# EAGLE board schemantic (EAGLE 9.4.2)
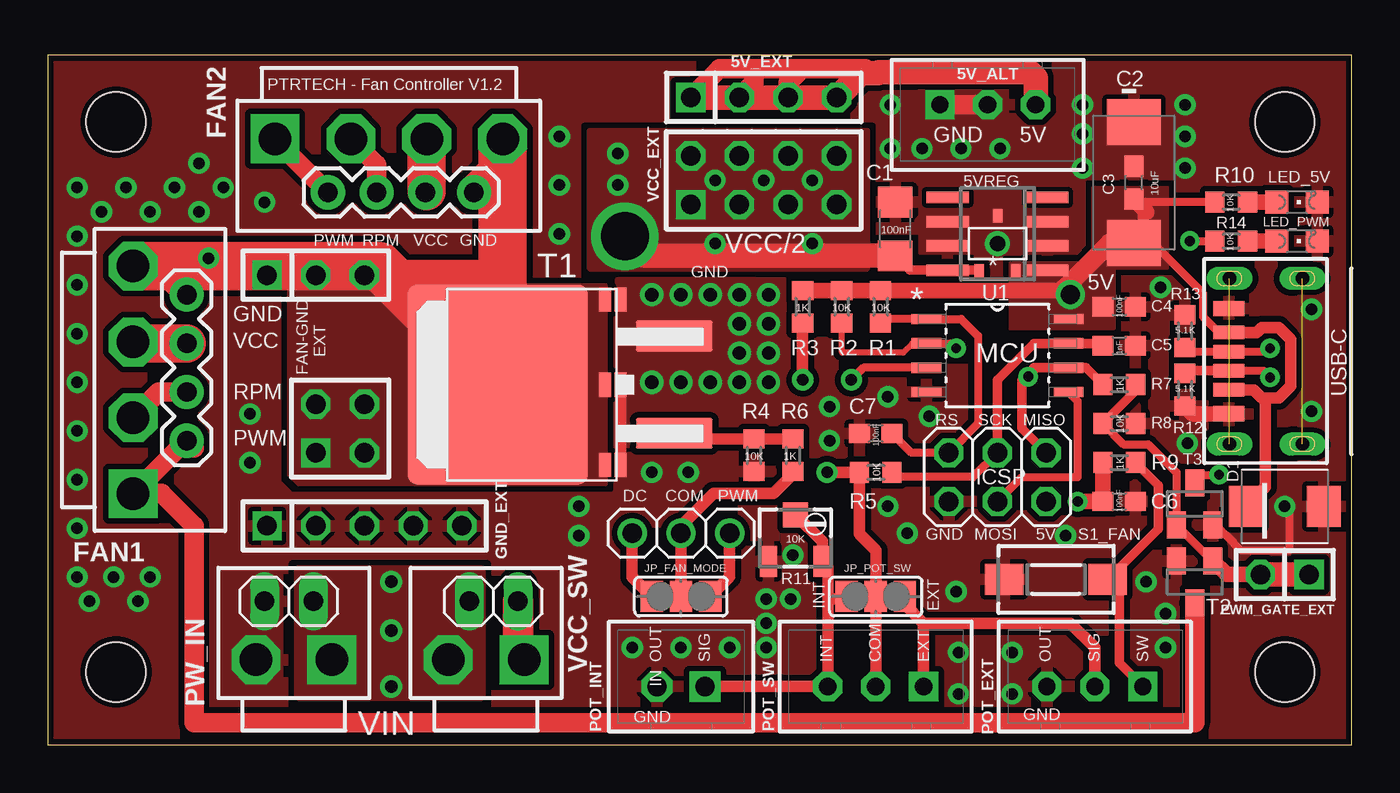
[diagram p0: board, top side]
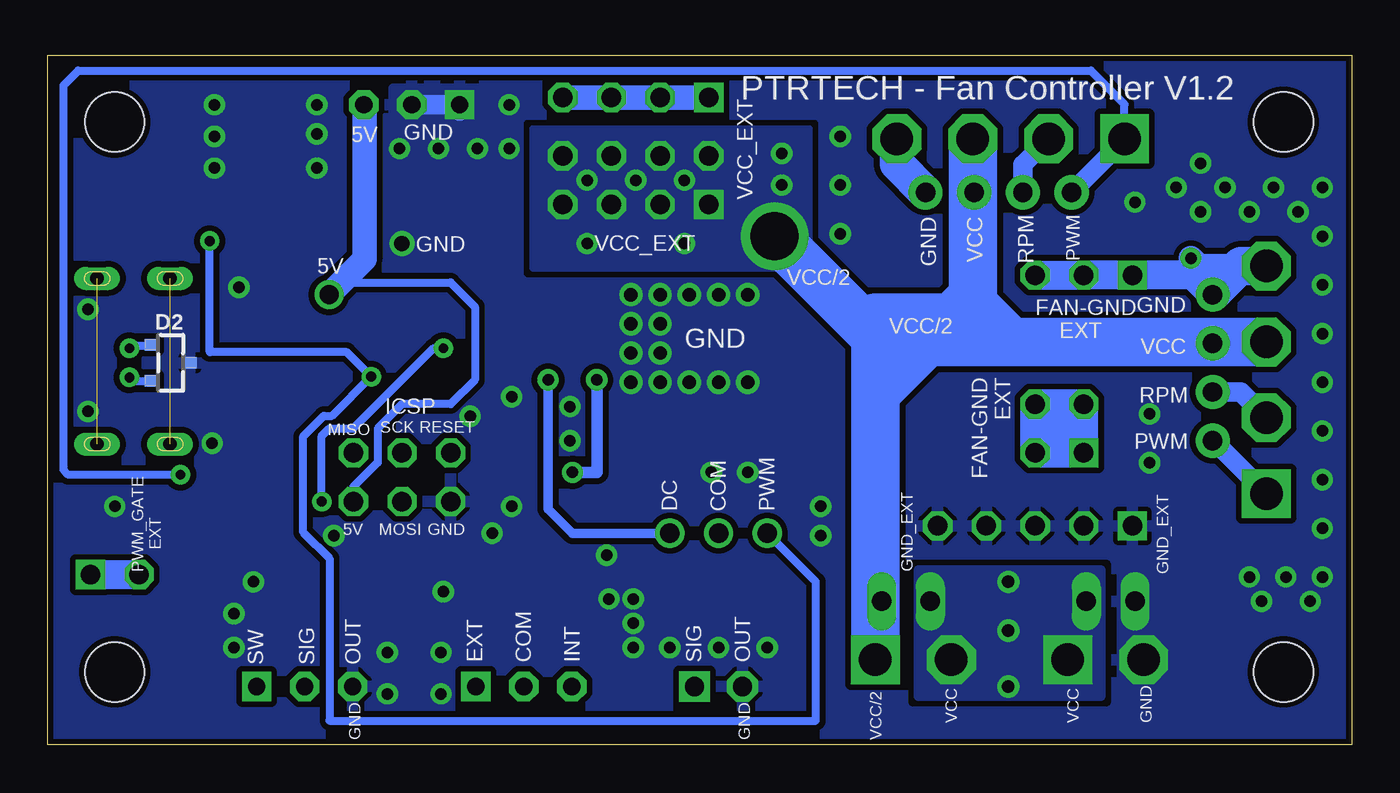
[diagram p1: board, bottom side, seen from below]

Size 68 x 36 mm. Coordinates in mm from the lower left corner, seen from the top.
Outline: 0,0 68,0 68,36 0,36 0,0
Copper layers (1*16): Top 0.035mm / dielectric 1.5mm / Bottom 0.035mm
Design rules "SparkFun-2-layer-STANDARD": minimum track width 10mil, minimum drill 20mil, track to track 10mil, track to pad 8mil, pad to pad 8mil, via to via 10mil, smd to smd 8mil, copper to edge 8mil, drill to drill 8mil, minimum pad ring 10mil, minimum via ring 10mil, stop-mask expansion 4mil, vias tented up to drill 25mil, thermal gap 10mil
Holes 3.1 mm at 3.56,3.81 3.56,32.5 64.52,3.81 64.52,32.5

## Footprints (pad centres in the part's own frame; a part is rotated, then mirrored left to right if it is on the bottom)
B3B-XH-A = drill 0.9 pad 1.524 square: 1 2.5,0 | drill 0.9 pad 1.524 octagon: 2 0,0; 3 -2.5,0
1X04 = drill 1.016 square: 1 -3.81,0 | drill 1.016 octagon: 2 -1.27,0; 3 1.27,0; 4 3.81,0
SO08 = smd 0.6 x 2.2: 1 -1.905,-2.6; 2 -0.635,-2.6; 3 0.635,-2.6; 4 1.905,-2.6; 5 1.905,2.6; 6 0.635,2.6; 7 -0.635,2.6; 8 -1.905,2.6
XC6206_SOT-23 = smd 0.5 x 0.7: 1 -0.95,-1.415; 2 0.95,-1.415; 3 0,1.44
C1206 = smd 1.6 x 1.8: 1 -1.4,0; 2 1.4,0
SMC_E = smd 2.4 x 2.8: + -3.15,0; - 3.15,0
C0603 = smd 1.1 x 1: 1 -0.85,0; 2 0.85,0
SMBJ = smd 1.78 x 2.16: A 2.04,0; C -2.03,0
SOT23 = smd 0.6 x 0.7: 1 -0.95,-1; 2 0.95,-1; 3 0,1
B4P-VH = drill 1.7 pad 2.54 square: 1 -5.94,0 | drill 1.7 pad 2.54 octagon: 2 -1.98,0; 3 1.98,0; 4 5.94,0
1X04-BIG = drill 1.016 pad 1.778: 1 0,0; 2 2.54,0; 3 5.08,0; 4 7.62,0
2X02 = drill 1.016 square: 1 -1.27,-1.27 | drill 1.016 octagon: 2 -1.27,1.27; 3 1.27,-1.27; 4 1.27,1.27
1X03 = drill 1.016 square: 1 -2.54,0 | drill 1.016 octagon: 2 0,0; 3 2.54,0
1X05 = drill 1.016 square: 1 -5.08,0 | drill 1.016 octagon: 2 -2.54,0; 3 0,0; 4 2.54,0; 5 5.08,0
2X03 = drill 1.016 octagon: 1 -2.54,-1.27; 2 -2.54,1.27; 3 0,-1.27; 4 0,1.27; 5 2.54,-1.27; 6 2.54,1.27
SMT-JUMPER_2_NO_NO-SILK = smd 0.635 x 1.27: 1 -0.406,0; 2 0.406,0
SJ_2 = smd 1.168 x 1.6: 1 -1.524,0; 2 0,0; 3 1.524,0
1X03' = drill 1.016: 1 -2.54,0; 2 0,0; 3 2.54,0
CHIPLED_0805 = smd 1.2 x 1.2: A 0,-1.05; C 0,1.05
B2B-XH-A = drill 1 pad 1.6 square: 1 1.25,0 | drill 1 pad 1.6 octagon: 2 -1.25,0
B2P-VH = drill 1.7 pad 2.54 square: 1 -1.98,0 | drill 1.7 pad 2.54 octagon: 2 1.98,0
1X02 = drill 1.016 long: 1 -1.27,0; 2 1.27,0
1X02' = drill 1.016 square: 1 -1.27,0 | drill 1.016 octagon: 2 1.27,0
R0603 = smd 1 x 1.1: 1 -0.85,0; 2 0.85,0
3223W = smd 0.9 x 1.6: 1 -1.4,-1.215; 3 1.4,-1.215 | smd 1.3 x 1.3: 2 0,1.215
DTSM-3 = smd 2 x 1.6: 1 -2.7,0; 2 2.7,0
D2PAK_TO263 = smd 4 x 1.6: 1 -6,2.54; 3 -6,-2.54 | smd 9.4 x 10.4: 2 3.2,0
SOT23' = smd 1 x 1.4: 1 -0.95,-1.1; 2 0.95,-1.1; 3 0,1.1
SOIC127P798X216-8N = smd 1.549 x 0.533: 1 -3.708,1.905; 2 -3.708,0.635; 3 -3.708,-0.635; 4 -3.708,-1.905; 5 3.708,-1.905; 6 3.708,-0.635; 7 3.708,0.635; 8 3.708,1.905
USB_TYPE_C_POWER_ONLY = smd 0.7 x 1.6: A5 -0.286,2.54; A9 1.71,2.54; B5 0.71,2.54; B9 -1.29,2.54 | smd 0.8 x 1.6: A12 2.96,2.54; B12 -2.54,2.54 | drill 0.7 pad 1 long: SHIELD1 -4.11,2.5; SHIELD2 4.53,2.5; SHIELD3 -4.11,-1.3; SHIELD4 4.53,-1.3
2X04 = drill 1.016 square: 1 -3.81,-1.27 | drill 1.016 octagon: 2 -3.81,1.27; 3 -1.27,-1.27; 4 -1.27,1.27; 5 1.27,-1.27; 6 1.27,1.27; 7 3.81,-1.27; 8 3.81,1.27

## Placement (x,y rotation side)
5V_ALT  B3B-XH-2  [B3B-XH-A]  49.02,33.4 180 top
5V_EXT  [1X04]  37.34,33.78 0 top
5VREG  LM2936M-5.0  [SO08]  49.53,26.67 90 top
5VREG_ALT  AP7381-50SA-7  [XC6206_SOT-23]  49.53,26.16 0 top
C1  100nF 60v  [C1206]  44.2,26.92 90 top
C2  10uF 10v  [SMC_E]  56.64,29.34 90 top
C3  2.2uF  [C0603]  56.64,29.34 90 top
C4  100nF  [C0603]  55.88,22.86 0 top
C5  1nF  [C0603]  55.88,20.83 0 top
C6  100nF  [C0603]  55.88,12.7 0 top
C7  100nF  [C0603]  43.18,16.26 180 top
D1  SMBJ5.0A  [SMBJ]  64.52,12.45 0 top
D2  CDSOT23-0502B  [SOT23]  61.59,19.94 270 bottom
FAN1  FAN1  [B4P-VH]  4.45,19.05 90 top
FAN1_ALT  1X4-BIG  [1X04-BIG]  7.24,15.88 90 top
FAN2  FAN1  [B4P-VH]  17.78,31.62 0 top
FAN2_ALT  1X4-BIG  [1X04-BIG]  14.61,28.83 0 top
FAN_GND_EXT1  [2X02]  15.24,16.51 0 top
FAN_GND_EXT2  [1X03]  13.97,24.51 0 top
GND_EXT  [1X05]  16.51,11.43 0 top
ICSP  Prog  [2X03]  49.53,13.97 180 top
JP1_T1_GND  JUMPER-SMT_2_NO_NO-SILK  [SMT-JUMPER_2_NO_NO-SILK]  29.46,18.8 180 top
JP2_T1_GND  JUMPER-SMT_2_NO_NO-SILK  [SMT-JUMPER_2_NO_NO-SILK]  29.46,14.61 180 top
JP31_T1_GND  JUMPER-SMT_2_NO_NO-SILK  [SMT-JUMPER_2_NO_NO-SILK]  29.46,23.24 180 top
JP_FAN_MODE  DC_COM_PWM  [SJ_2]  33.02,7.75 0 top
JP_FAN_MODE2  [1X03']  33.02,11.05 0 top
JP_POT_SW  [SJ_2]  43.18,7.75 0 top
LED_5V  [CHIPLED_0805]  65.15,28.32 270 top
LED_PWM  [CHIPLED_0805]  65.15,26.29 270 top
POT_EXT  POT_EXT  [B3B-XH-A]  54.61,3.05 0 top
POT_INT  POT_INT  [B2B-XH-A]  33.02,3.05 0 top
POT_SW  POT_SW  [B3B-XH-A]  43.18,3.05 0 top
PW_IN  Power In  [B2P-VH]  12.83,4.45 180 top
PW_IN_ALT  [1X02]  12.57,7.49 180 top
PWM_GATE_EXT  [1X02']  64.52,8.89 180 top
R1  10K  [R0603]  43.43,22.86 270 top
R2  10K  [R0603]  41.4,22.86 270 top
R3  1K  [R0603]  39.37,22.86 90 top
R4  10K  [R0603]  36.83,15.11 90 top
R5  10K  [R0603]  43.18,14.22 0 top
R6  1K  [R0603]  38.86,15.11 270 top
R7  1K  [R0603]  55.88,18.8 180 top
R8  10K  [R0603]  55.88,16.76 180 top
R9  1K  [R0603]  55.88,14.73 0 top
R10  10K  [R0603]  61.72,28.32 0 top
R11  10K  [3223W]  38.99,10.79 0 top
R12  5.1K  [R0603]  59.31,18.54 270 top
R13  5.1K  [R0603]  59.31,21.59 270 top
R14  10K  [R0603]  61.72,26.29 180 top
S1_FAN  DTSM-3  [DTSM-3]  52.58,8.64 0 top
T1  BUK963R3-60E,118  [D2PAK_TO263]  26.67,18.8 180 top
T2  AO3400  [SOT23']  59.82,8.51 180 top
T3  AO3400  [SOT23']  59.82,12.57 0 top
U1  ATTINY85-20SU  [SOIC127P798X216-8N]  49.53,20.32 0 top
USB-C  USB_TYPE_C_POWER_ONLY  [USB_TYPE_C_POWER_ONLY]  64.14,19.81 90 top
VCC_EXT  [2X04]  37.34,29.46 0 top
VCC_SW  Power SW  [B2P-VH]  22.86,4.45 180 top
VCC_SW_ALT  [1X02]  23.24,7.49 180 top

## Library data of the parts
5V_ALT POT_EXT POT_INT POT_SW = con-jst-xh
5V_EXT FAN_GND_EXT1 FAN_GND_EXT2 GND_EXT ICSP PW_IN_ALT PWM_GATE_EXT VCC_EXT VCC_SW_ALT = pinhead
5VREG = national-semiconductor; MF: NATIONAL SEMICONDUCTOR; MPN: LM2936HVMA-5.0/NOPB; OC_FARNELL: 9494421; OC_NEWARK: 41K4515
5VREG_ALT = Voltage Regulator; C1: 1uF
C1 C3-C7 = rcl; SPICEPREFIX: C
C2 = rcl; MODEL: 593D106X9050E2TE3; SPICEPREFIX: C
D1 D2 = diode
FAN1 FAN2 PW_IN VCC_SW = con-jst-vh
FAN1_ALT FAN2_ALT = adafruit
JP1_T1_GND JP2_T1_GND JP31_T1_GND = SparkFun-Jumpers
JP_FAN_MODE JP_POT_SW = jumper
JP_FAN_MODE2 = adafruit; 2PIN_FAN: 1&2; 3PIN_FAN: 1&2; 4PIN_FAN: 2&3
LED_5V LED_PWM = led
R1-R10 R12-R14 = rcl; SPICEPREFIX: R
R11 = pot; OPTIONAL: YES
S1_FAN = switch-tact; OPTIONAL: YES
T1 = we-transistor; ALT1: IRF2805SPbF; OLD: SQM110P06-8m9L_GE3
T2 T3 = adafruit; SPICEPREFIX: J
U1 = Atmel_By_element14_Batch_1-00; MPN: ATTINY85-20SU; OC_FARNELL: 1455164; OC_NEWARK: 58M3797; PACKAGE: SOIC-8; SUPPLIER: Atmel
USB-C = USB_C_FEMALE_POWER; CURRENT: HIGH; SOCKET: FEMALE

## Nets
+5V: 5V_ALT.3 5V_EXT.1 5V_EXT.2 5V_EXT.3 5V_EXT.4 5VREG.1 5VREG_ALT.2 C2.+ C3.1 C4.1 D1.C ICSP.2 R1.1 R2.1 R3.2 R10.1 U1.8 USB-C.A9 USB-C.B9
FAN1_LATCH: FAN1.2 FAN1_ALT.2
FAN1_PWM: FAN1.1 FAN1_ALT.1 T2.3
FAN2_LATCH: FAN2.2 FAN2_ALT.2
FAN2_PWM: FAN2.1 FAN2_ALT.1 T3.3
FAN_GND: FAN1.4 FAN1_ALT.4 FAN2.4 FAN2_ALT.4 FAN_GND_EXT1.1 FAN_GND_EXT1.2 FAN_GND_EXT1.3 FAN_GND_EXT1.4 FAN_GND_EXT2.1 FAN_GND_EXT2.2 FAN_GND_EXT2.3 JP1_T1_GND.2 JP2_T1_GND.2 JP31_T1_GND.2 T1.2
FAN_SW: POT_EXT.1 R9.2 S1_FAN.2
GND: 5V_ALT.1 5V_ALT.2 5VREG.2 5VREG.3 5VREG.6 5VREG.7 5VREG_ALT.3 C1.2 C2.- C3.2 C4.2 C5.2 C6.2 C7.2 D1.A D2.3 GND_EXT.1 GND_EXT.2 GND_EXT.3 GND_EXT.4 GND_EXT.5 ICSP.6 JP1_T1_GND.1 JP2_T1_GND.1 JP31_T1_GND.1 LED_5V.C LED_PWM.C POT_EXT.3 POT_INT.2 PW_IN.2 PW_IN_ALT.2 R4.1 R8.1 R11.1 R12.2 R13.1 S1_FAN.1 T1.3 T2.2 T3.2 U1.4 USB-C.A12 USB-C.B12
JP1_COM: JP_FAN_MODE2.2 JP_FAN_MODE.2 R6.2
LED1_ANODE: LED_5V.A R10.2
LED2_ANODE: LED_PWM.A R14.1
N$1: USB-C.SHIELD1 USB-C.SHIELD2
N$2: USB-C.SHIELD3 USB-C.SHIELD4
PB0_MOSI: ICSP.4 U1.5
PB1_MISO: ICSP.1 JP_FAN_MODE2.1 JP_FAN_MODE.1 R7.2 R14.2 U1.6
PB2_SCK: C5.1 ICSP.3 R5.2 U1.7
PB3: C6.1 R2.2 R9.1 U1.2
PB4: JP_FAN_MODE2.3 JP_FAN_MODE.3 U1.3
PB5_RESET: C7.1 ICSP.5 R1.2 U1.1
POTEXT_SIGNAL: JP_POT_SW.3 POT_EXT.2 POT_SW.1
POTINT_SIGNAL: JP_POT_SW.1 POT_INT.1 POT_SW.3 R11.2 R11.3
POTSW_COM: JP_POT_SW.2 POT_SW.2 R3.1 R5.1
PWM_GATE: PWM_GATE_EXT.1 PWM_GATE_EXT.2 R7.1 R8.2 T2.1 T3.1
T1_GATE: R4.2 R6.1 T1.1
USBC_CC1: D2.2 R12.1 USB-C.A5
USBC_CC2: D2.1 R13.2 USB-C.B5
VCC: PW_IN.1 PW_IN_ALT.1 VCC_SW.2 VCC_SW_ALT.2
VCC/2: 5VREG.8 5VREG_ALT.1 C1.1 FAN1.3 FAN1_ALT.3 FAN2.3 FAN2_ALT.3 VCC_EXT.1 VCC_EXT.2 VCC_EXT.3 VCC_EXT.4 VCC_EXT.5 VCC_EXT.6 VCC_EXT.7 VCC_EXT.8 VCC_SW.1 VCC_SW_ALT.1

## Tracks (layer width: path | path; a pad name or v marks a point on that pad's centre or on a via)
+5V  (via drill 1)
  Top 0.406: USB-C.A9 61.07,21.52 60.27,22.33 60.27,23.55 57.15,26.67 | R10.1 56.81,28.32
  Top 0.61: C3.1 57.15,27.98 57.15,26.67 57.15,25.4 | 63.5,18.11 63.31,18.11 62.9,18.52 USB-C.B9 | 63.5,18.11 64.2,18.11 64.82,18.73 64.82,21.14 64.2,21.77 63.31,21.77 63.07,21.52 61.07,21.52 | 63.5,18.11 63.5,13.46 D1.C
  Top 0.813: 57.32,27.81 C3.1 56.81,28.32 | v53.34,23.5 53.12,23.71 R1.1 R2.1 R3.2
  Top 1.016: C2.+ 55.4,26.19 53.02,23.81 | 39.37,35.29 42.66,35.29 42.42,35.05 | 39.37,35.29 36.83,35.29 | 36.83,35.29 35.03,35.29 5V_EXT.1 | 5V_EXT.3 38.61,34.53 39.37,35.29 | 36.83,35.29 36.83,34.54 5V_EXT.2
  Top 1.27: 5V_EXT.1 5V_EXT.2 5V_EXT.3 5V_EXT.4 42.42,35.05 43.3,35.05 43.34,35.1 51.22,35.1 51.52,34.8 5V_ALT.3
  Bottom 0.406: ICSP.2 52.07,13.46 50.8,14.73 50.8,16.51 49.53,17.78 46.99,17.78 45.72,19.05 45.72,22.86 46.99,24.13 52.7,24.13
  Bottom 0.508: v53.34,23.5 52.7,24.13
  Bottom 1.27: v53.34,23.5 51.48,25.35 51.48,33.36 5V_ALT.3 | 5V_EXT.1 5V_EXT.2 5V_EXT.3 5V_EXT.4
  pour Top (rank 5, no thermals): 55.63,21.72 55.63,24.89 58.42,24.89 58.42,29.08 54.48,29.08 54.48,25.15 50.16,25.15 50.16,21.72
FAN1_LATCH
  Top 1.016: FAN1.2 5.79,18.41 FAN1_ALT.2
  Bottom 1.016: FAN1.2 5.79,18.41 FAN1_ALT.2
FAN1_PWM
  Top 1.016: T2.3 59.82,1.14 7.62,1.14 7.62,11.43 5.94,13.11 FAN1.1 7.21,15.88 FAN1_ALT.1 7.62,15.49
  Bottom 1.016: FAN1.1 7.21,15.88 FAN1_ALT.1
FAN2_LATCH
  Top 1.016: FAN2_ALT.2 17.14,30.28 FAN2.2
  Bottom 1.016: FAN2.2 17.14,30.28 FAN2_ALT.2
FAN2_PWM  (via drill 0.51)
  Top 0.406: T3.3 60.24,14.1 v61.09,14.1
  Top 1.016: FAN2_ALT.1 11.84,31.59 FAN2.1
  Bottom 0.406: FAN2.1 11.84,33.43 13.59,35.18 66.42,35.18 67.18,34.42 67.18,14.35 66.93,14.1 v61.09,14.1
  Bottom 1.016: FAN2_ALT.1 11.84,31.59 FAN2.1
FAN_GND  (via drill 0.6)
  Top 1.27: FAN1_ALT.4 5.74,24.99 FAN1.4
  Top 1.8: FAN2_ALT.4 23.72,30.32 FAN2.4
  Top 2: 17.96,24.31 23.54,24.31 23.72,24.13
  Top 2.54: 22.45,19.82 T1.2 | T1.2 17.96,24.31 17.28,24.99 14.85,24.99 14.83,24.97 | 14.83,24.97 8.89,24.97 8.87,24.99 FAN1.4 14.81,24.99 14.83,24.97 | T1.2 23.72,19.05 23.72,24.13 FAN2.4
  Bottom 1.016: v8.38,25.4 8.38,24.64 8.26,24.51
  Bottom 1.27: FAN1.4 7.97,24.99 v8.38,25.4
  Bottom 1.5: FAN_GND_EXT2.3 FAN_GND_EXT2.2 FAN_GND_EXT2.1 8.26,24.51 FAN1_ALT.4 | FAN_GND_EXT1.2 FAN_GND_EXT1.4 FAN_GND_EXT1.3 | FAN_GND_EXT1.3 FAN_GND_EXT1.1 FAN_GND_EXT1.2 | FAN_GND_EXT1.2 FAN_GND_EXT1.3
  Bottom 1.8: FAN1_ALT.4 5.74,24.99 | FAN2_ALT.4 23.72,30.32 FAN2.4
  Bottom 2: 5.74,24.99 FAN1.4
  pour Top (isolate 0.305, rank 5, no thermals): 12.57,24 29.08,24 29.08,13.59 13.08,13.59 12.57,14.1
FAN_SW
  Top 0.508: POT_EXT.1 55.88,4.28 55.88,8.89 | S1_FAN.2 57.91,11.27 57.91,13.55 R9.2
  Top 0.61: 55.88,8.89 55.53,8.89 S1_FAN.2
GND  (via drill 0.6, 0.7, 0.8)
  Top 0.406: T3.2 60.92,11.47 61.19,11.2 61.43,10.96 62.23,10.16 64.77,10.16 64.77,12.19 v64.52,12.45
  Top 0.61: JP2_T1_GND.1 JP1_T1_GND.1
  Top 0.813: USB-C.B12 59.73,17.27 R12.2
  Top 1.016: 5V_ALT.1 5V_ALT.2
  Bottom 1.016: 5V_ALT.2 5V_ALT.1 46.52,33.06
  other vias: 44.83,11.05 43.81,18.16 49.53,26.16 26.67,31.75 43.94,31.11 30.48,5.08 33.02,5.08 36.07,21.97 1.52,13.84 47.62,31.11 53.98,30.1 59.31,30.1 45.97,17.14 35.56,5.08 37.47,5.08 1.52,16.38 1.52,18.92 1.52,21.46 1.52,24 47.5,2.67 53.09,10.92 43.81,12.45 1.52,26.54 1.52,29.08 4.06,29.08 6.6,29.08 1.52,11.3 1.52,8.76 5.33,8.76 53.98,33.4 26.67,29.21 9.14,29.08 7.87,27.81 5.33,27.81 2.79,27.81 33.02,18.92 31.5,18.92 34.54,18.92 7.87,30.35 10.54,17.27 10.54,14.73 59.31,31.75 65.91,22.73 26.67,26.67 11.3,28.32 36.07,18.92 31.5,23.5 33.02,23.5 34.54,23.5 36.07,23.5 36.07,20.45 57.28,8.51 47.37,8 47.5,4.83 50.29,4.83 50.29,2.67 27.69,10.92 31.5,14.22 33.4,14.22 27.69,12.45 37.47,6.35 37.47,7.62 38.73,7.62 38.86,9.91 3.43,8.76 65.91,17.4 2.16,7.49 4.7,7.49 45.59,31.11 49.66,31.11 53.98,31.88 59.44,15.75 58.04,23.88 59.31,33.4 58.29,5.08 58.29,6.86 43.94,33.4 37.59,18.92 37.59,20.45 37.59,21.97 37.59,23.5 40.77,15.88 40.77,17.65
  pour Top (isolate 0.305, rank 6): -0.64,36.83 68.71,36.83 68.71,-0.89 -0.64,-0.89
  pour Bottom (isolate 0.305, rank 6): -1.65,37.97 68.58,37.97 68.58,-2.03 -1.65,-2.03
  pour Top (rank 5, no thermals): 45.47,32.26 45.47,25.65 53.85,25.65 53.85,29.59 58.42,29.59 58.42,32.26
  pour Top (no thermals): 9.02,9.14 12.06,9.14 12.06,2.54 9.02,2.54
  pour Bottom (no thermals): 9.02,9.14 12.06,9.14 12.06,2.54 9.02,2.54
  pour Top (isolate 0.305, no thermals): 29.84,24.13 36.83,24.13 36.83,17.91 29.84,17.91
  pour Top (isolate 0.305, no thermals): 29.72,13.72 29.72,15.11 31.62,15.11 31.62,13.72
  pour Top (isolate 0.254, rank 5): 65.41,28.96 67.44,28.96 67.44,10.79 65.41,10.79
  pour Bottom (isolate 0.406, rank 6, no thermals): 45.47,34.29 50.04,34.29 50.04,32.13 45.47,32.13
  pour Top (rank 6, no thermals): 45.59,34.29 49.91,34.29 49.91,32.38 45.59,32.38
JP1_COM
  Top 0.61: R6.2 38.86,14.15 37.84,13.13 34.72,13.13 33.02,11.43 JP_FAN_MODE2.2 JP_FAN_MODE.2
LED1_ANODE
  Top 0.813: LED_5V.A R10.2
LED2_ANODE
  Top 0.813: R14.1 LED_PWM.A
N$1  (1 unrouted)
N$2  (1 unrouted)
PB0_MOSI
  Top 0.406: ICSP.4 50.8,13.97 53.72,13.97 53.72,17.93 U1.5
PB1_MISO  (via drill 0.51)
  Top 0.406: U1.6 51.6,19.68 v51.14,19.22 | v59.56,26.29 R14.2
  Top 0.508: ICSP.1 50.8,16.51 50.8,19.05 51.44,19.68 U1.6 54.14,19.68 R7.2
  Top 0.61: JP_FAN_MODE.1 30.48,8.76 JP_FAN_MODE2.1
  Bottom 0.406: v59.56,26.29 59.56,20.49 52.41,20.49 v51.14,19.22 53.19,17.17 53.61,17.17 54.69,16.1 54.69,11.09 53.31,9.72 53.31,1.27 27.94,1.27 27.94,8.51 JP_FAN_MODE2.1
PB2_SCK
  Top 0.406: ICSP.3 48.26,13.97 44.28,13.97 R5.2
  Top 0.508: ICSP.3 49.53,19.05 51.44,20.95 U1.7 54.9,20.95 C5.1
PB3  (via drill 0.51)
  Top 0.305: R2.2 41.4,20.51 41.44,20.47 44.6,20.47 45.09,20.95 U1.2
  Top 0.406: U1.2 47.12,20.95 v47.37,20.7
  Top 0.813: v53.72,12.7 C6.1 R9.1
  Bottom 0.406: v47.37,20.7 47.88,20.7 52.07,16.51 53.34,16.51 53.72,16.13 v53.72,12.7
PB4  (via drill 0.6)
  Top 0.406: U1.3 42.55,19.68 v41.91,19.05
  Top 0.61: JP_FAN_MODE.3 35.56,8.76 JP_FAN_MODE2.3
  Bottom 0.508: v41.91,19.05 41.91,12.32 40.64,11.05 JP_FAN_MODE2.3
PB5_RESET
  Top 0.406: R1.2 43.65,22.23 U1.1 47.62,22.23 48.51,21.34 48.51,16.76 ICSP.5 45.05,15.24 C7.1
POTEXT_SIGNAL
  Top 0.61: POT_EXT.2 54.61,5.08 53.34,6.35 45.68,6.35 | POT_SW.1 45.68,6.35 | 45.68,6.35 44.7,7.33 JP_POT_SW.3
POTINT_SIGNAL
  Top 0.61: 41.66,7.33 JP_POT_SW.1 41.53,7.62 40.68,7.62 | R11.2 40.39,10.61 R11.3 40.68,9.29 40.68,7.62 | POT_INT.1 POT_SW.3 40.68,7.62
POTSW_COM  (via drill 0.6)
  Top 0.61: POT_SW.2 JP_POT_SW.2 43.18,10.16 42.33,11.01 R5.1 v40.64,14.22 | R3.1 v39.37,19.05
  Bottom 0.61: v40.64,14.22 39.37,14.22 v39.37,19.05
PWM_GATE
  Top 0.406: T2.1 60.73,9.61 T3.1 58.87,14.22 57.4,15.69 56.11,15.69 R8.2
  Top 0.508: R7.1 56.73,18.46 R8.2
  Top 0.813: PWM_GATE_EXT.2 61.49,8.89 T2.1
  Top 1.27: PWM_GATE_EXT.1 PWM_GATE_EXT.2
  Bottom 1.5: PWM_GATE_EXT.1 PWM_GATE_EXT.2
T1_GATE
  Top 0.61: R6.1 R4.2 32.96,15.96 T1.1
USBC_CC1  (via drill 0.51)
  Top 0.406: USB-C.A5 63.41,19.53 v63.75,19.18
  Top 0.508: USB-C.A5 59.44,19.53 R12.1
  Bottom 0.406: v63.75,19.18 63.57,18.99 D2.2
USBC_CC2  (via drill 0.51)
  Top 0.406: R13.2 59.53,20.52 USB-C.B5 63.58,20.52 v63.75,20.7
  Bottom 0.406: v63.75,20.7 63.63,20.83 62.66,20.83 D2.1
VCC  (via drill 0.65)
  other vias: 17.91,8.51 17.91,3.05 17.91,5.97
  pour Top (isolate 0.406, rank 5, no thermals): 13.08,9.14 13.08,2.54 22.61,2.54 22.61,9.14
  pour Bottom (isolate 0.406, rank 5, no thermals): 13.08,9.14 13.08,2.54 22.61,2.54 22.61,9.14
VCC/2  (via drill 0.6, 2.5)
  Top 0.508: C1.1 44.95,24.77 5VREG.8 48.56,24.77 5VREG_ALT.1
  Top 1.27: C1.1 31.11,25.53 v30.1,26.54 | 19.76,28.9 FAN2_ALT.3
  Top 1.6: VCC_SW_ALT.1 24.51,4.77
  Top 1.8: 24.51,4.77 VCC_SW.1
  Top 2: FAN2.3 19.76,28.9 | FAN1_ALT.3 4.52,20.95 FAN1.3
  Bottom 2.54: 24.84,18.34 22.15,21.03 | FAN1.3 17.78,21.03 | 17.78,21.03 20.32,21.03 | 20.32,21.03 22.15,21.03 | 22.15,21.03 19.76,23.42 FAN2.3 19.76,23.01 17.78,21.03 | VCC_SW.1 24.84,18.34 | 24.84,21.28 24.84,22.3 21.59,22.3 20.32,21.03 | 24.84,21.28 24.84,18.34 | v30.1,26.54 24.84,21.28
  other vias: 29.72,29.21 37.34,29.46 29.72,30.86 34.8,29.46 39.88,29.46 39.88,26.16 34.8,26.16
  pour Top (isolate 0.305, no thermals): 28.32,32 42.67,32 42.67,24.89 28.32,24.89
  pour Bottom (isolate 0.305, no thermals): 42.67,32.13 28.32,32.13 28.32,24.89 42.67,24.89

## Text on the board
tNames: PTRTECH - Fan Controller V1.2 | - | GND | 5V | 10uF | 10K | 100nF | PWM | RPM | VCC | GND | VCC/2 | 10K | * | GND | 5V | 1K | 10K | 10K | 100nF | GND | VCC | 1nF | 5.1K | MCU | FAN-GND / EXT | RPM | 1K | 5.1K | 100nF | RS | SCK | MISO | PWM | 10K | 10K | 1K | 10K | 1K | | | DC COM PWM | 100nF | 10K | GND | MOSI | 5V | INT | EXT | OUT | SIG | INT | COM | EXT | OUT | SIG | SW | IN | VIN | GND | GND
bNames: PTRTECH - Fan Controller V1.2 | GND | 5V | PWM | RPM | VCC | GND | VCC_EXT | GND | VCC_EXT | 5V | VCC/2 | GND | VCC | FAN-GND / EXT | VCC/2 | GND | RPM | FAN-GND / EXT | RESET | SCK | ICSP | MISO | PWM | GND_EXT | GND_EXT | PWM | COM | DC | GND | MOSI | 5V | PWM_GATE / EXT | OUT | SIG | INT | COM | EXT | OUT | SIG | SW | GND | VCC | VCC | VCC/2 | GND | GND